# Altium PCB OpenCameraSlider_PCB.PcbDoc
Units mm, origin at the board's own origin, x right, y up, seen from the top; angles counter-clockwise.
Board outline 100 x 40 mm, 2 copper layers (Top Layer, Bottom Layer), stack 1.571 mm thick; 18 components, 27 nets, 111 pads, 11 vias.
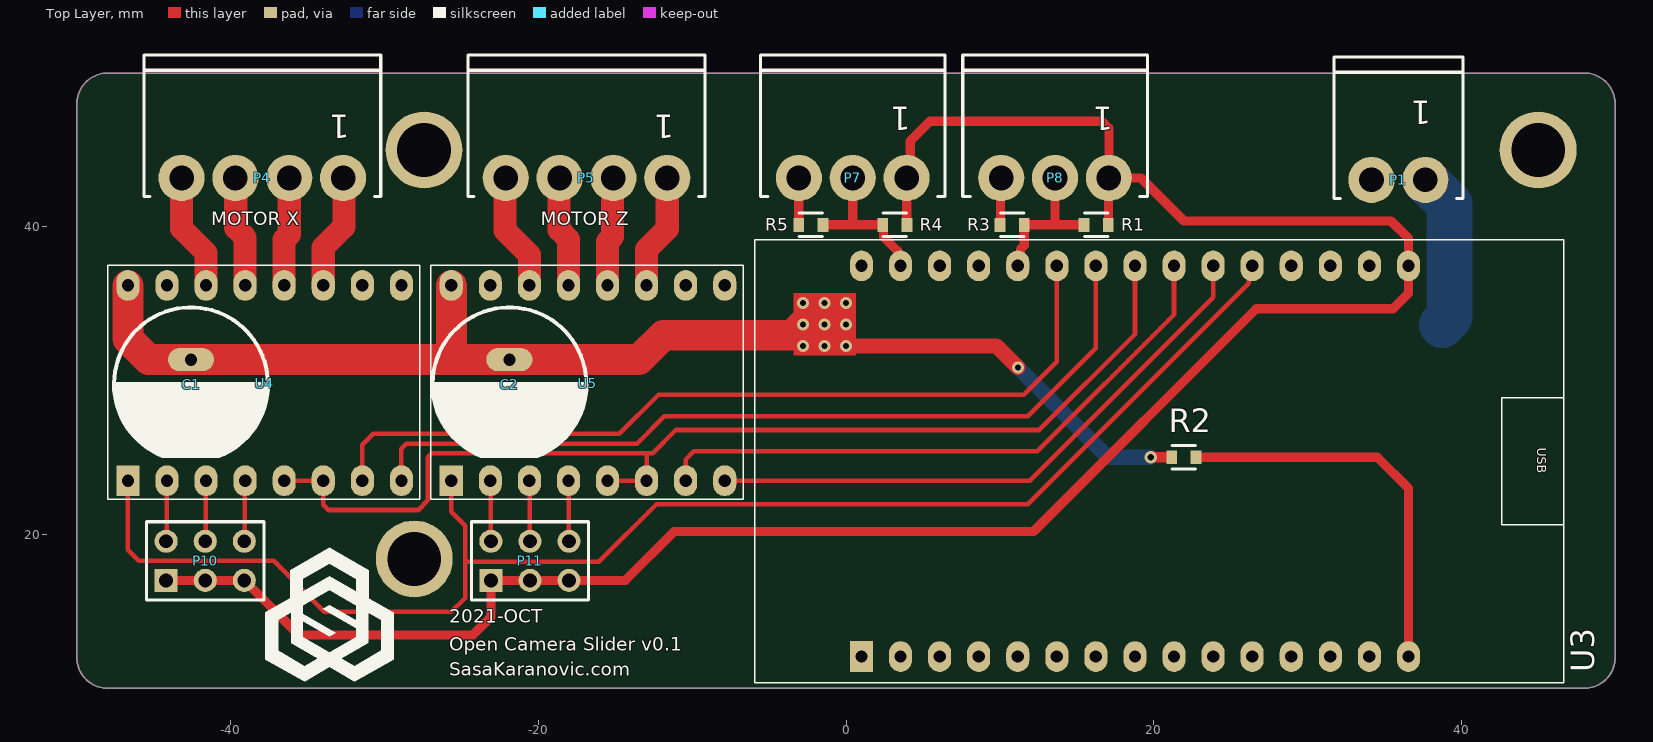
[diagram p0: Top Layer view]
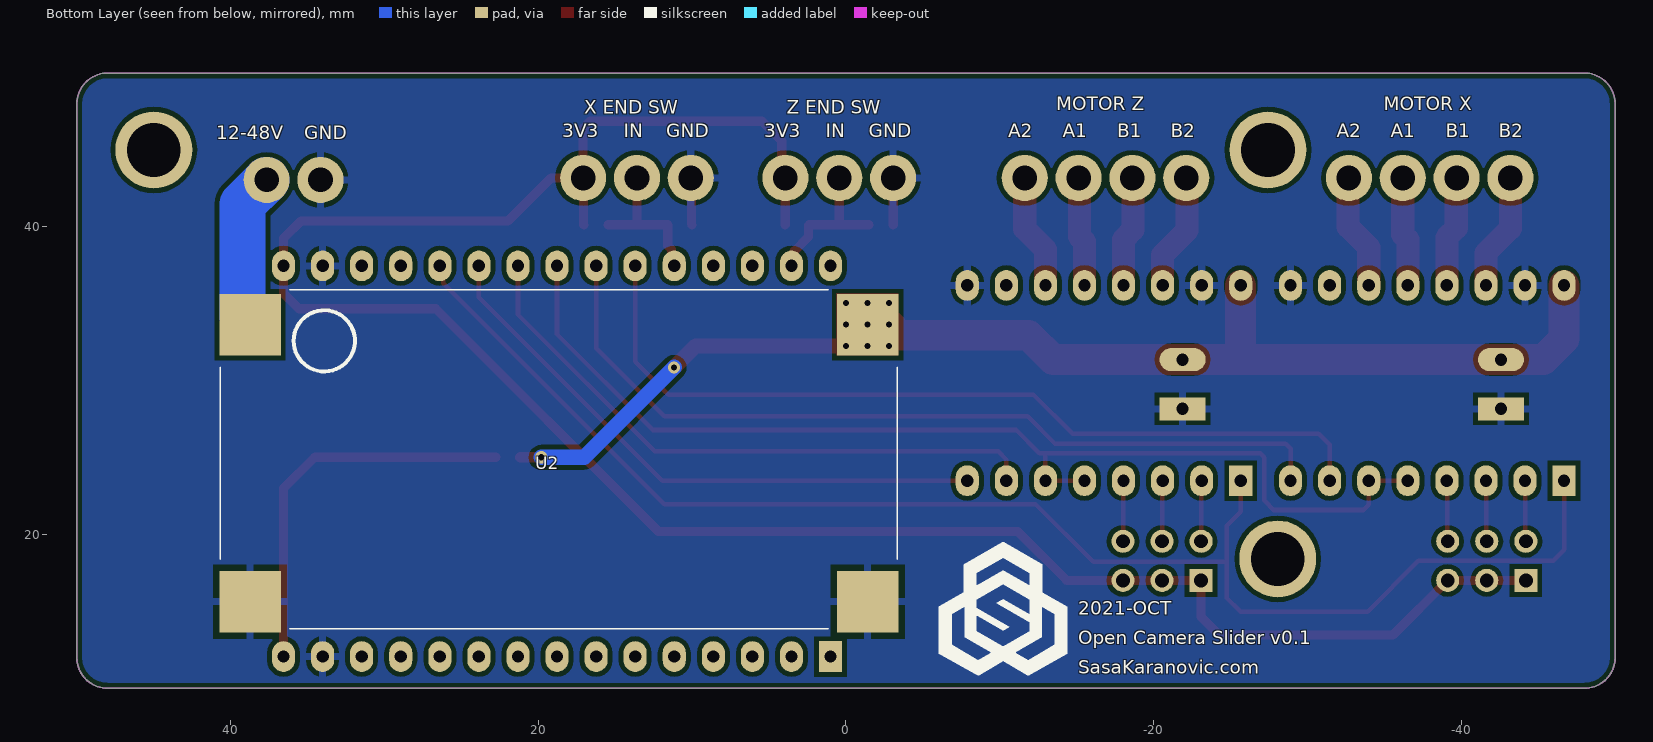
[diagram p1: Bottom Layer view, seen from below]
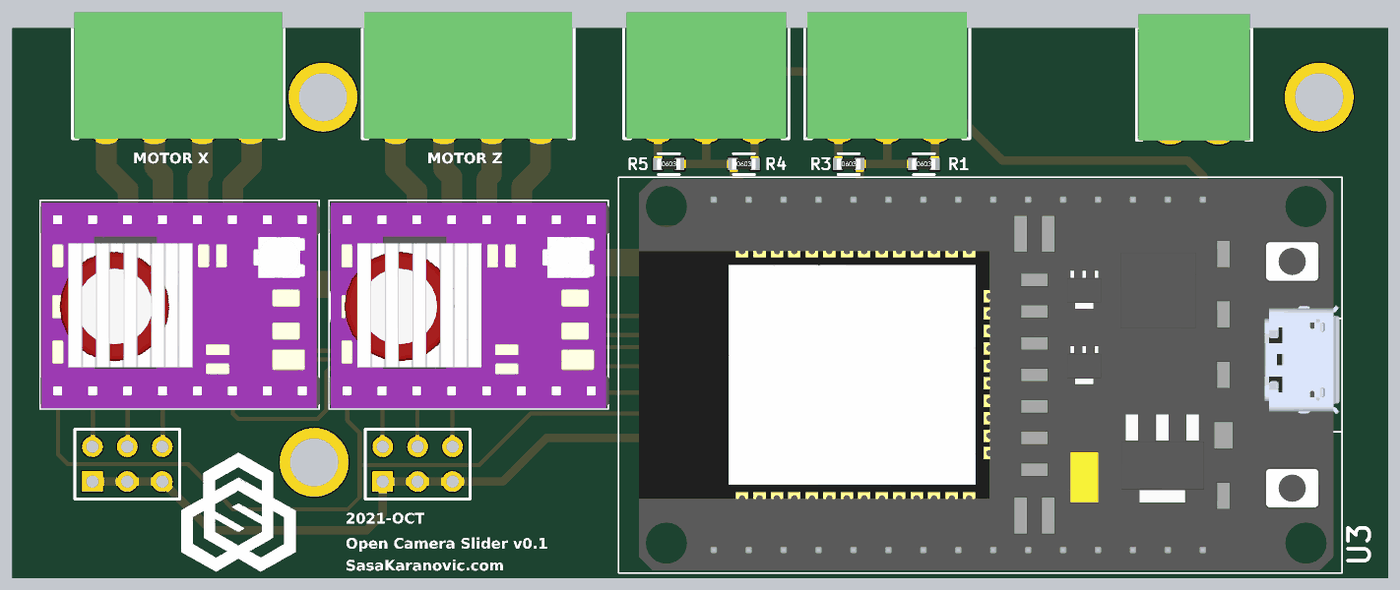
[diagram p2: 3D render of the assembled board from above, using the file's embedded part models]

## Layer stack, top to bottom
Top Solder: solder mask 0.0102, Solder Resist, Dk 3.5
Top Layer: signal copper 0.0356
Dielectric 1: dielectric 1.5, FR-4, Dk 4.8
Bottom Layer: signal copper 0.0356
Bottom Solder: solder mask 0.0102, Solder Resist, Dk 3.5

## Board outline
-48,10 cw(c-48,12) -50,12 -50,48 cw(c-48,48) -48,50 48,50 cw(c48,48) 50,48 50,12 cw(c48,12) 48,10

## Design rules (kind name [scope] priority, off if disabled: settings)
Clearance Clearance_1 [InNamedPolygon('GND_L02_P001')] p1: gap=0.3 ignorepadtopadclearanceinfootprint=FALSE
Clearance [All] p2: gap=0.254 ignorepadtopadclearanceinfootprint=FALSE
HoleSize [All] p1: absolutevalues=TRUE maxlimit=50 minlimit=0.4 maxpercent=80.000 minpercent=20.000
MinimumSolderMaskSliver [All] p1 off: minsoldermaskwidth=0.1
PlaneConnect [All] p1: pad.planeconnectstyle=Relief pad.reliefexpansion=0.508 pad.reliefentries=4 pad.reliefconductorwidth=0.254 pad.reliefairgap=0.254 via.planeconnectstyle=Direct via.reliefexpansion=0.508 via.reliefentries=4 via.reliefconductorwidth=0.254 via.reliefairgap=0.254
PolygonConnect [All] p1: thpad.connectstyle=Relief thpad.reliefconductorwidth=0.5 thpad.reliefentries=4 thpad.polygonreliefangle="90 Angle" thpad.airgapwidth=0.3 smdpad.connectstyle=Relief smdpad.reliefconductorwidth=0.5 smdpad.reliefentries=4 smdpad.polygonreliefangle="90 Angle" smdpad.airgapwidth=0.4 via.connectstyle=Direct via.reliefconductorwidth=0.254 via.reliefentries=4 via.polygonreliefangle="90 Angle" via.airgapwidth=0.254
RoutingVias [All] p1: holewidth=0.8 width=0.8 viastyle="Through Hole" minholewidth=0.3 minwidth=0.6 maxholewidth=0.4 maxwidth=50
SilkToSilkClearance [All] p1 off: silktosilkclearance=0.1
SilkToSolderMaskClearance [IsPad] p1 off: minsilkscreentomaskgap=0.1 clearancetoexposedcopper=TRUE
SolderMaskExpansion [All] p1: expansion=0.102 istentingtop=FALSE
Width [All] p1: maxlimit=50 minlimit=0.154 preferedwidth=0.2
25 further rules are at their usual default settings.

## Components (designator, comment, footprint, x,y, rotation, side; value= is the part's Value field where it differs from the comment)
C1 "16V" "Electrolytic Cap 3.2mm" -42.582,29.769 r270 top value=100uF
C2 "16V" "Electrolytic Cap 3.2mm" -21.881,29.769 r270 top value=100uF
P1 "Power In" TERMINAL_2POS_90DEG_2PART 35.913,51.053 r180 top
P4 "X-Axis Motor" TERMINAL_4POS_90DEG_2PART -37.945,51.18 r180 top locked
P5 "Z-Axis Motor" TERMINAL_4POS_90DEG_2PART -16.87,51.18 r180 top locked
P7 "Hall Sensor" TERMINAL_3POS_90DEG_2PART 0.437,51.18 r180 top locked
P8 "End Switch" TERMINAL_3POS_90DEG_2PART 13.589,51.18 r180 top locked
P10 "Header 3X2" HDR2X3 -44.196,17.018 r0 top
P11 "Header 3X2" HDR2X3 -23.087,17.018 r0 top
R1 "Res" 0603 16.256,40.132 r0 top value=10K
R2 "Res" 0603 21.971,25.019 r180 top value=0R
R3 "Res" 0603 10.795,40.132 r0 top value=DNP
R4 "Res" 0603 3.175,40.132 r0 top value=10K
R5 "Res" 0603 -2.286,40.132 r0 top value=DNP
U2 "LM2596-DC-DC Module" "LM2596-DC-DC Module" 18.669,24.638 r180 bottom
U3 "ESP32 Dev Kit" ESP32-DevModule 20.066,24.765 r90 top locked
U4 "DRV8825 Module" DRV8825_MODULE -37.883,29.845 r90 top locked
U5 "DRV8825 Module" DRV8825_MODULE -16.864,29.845 r90 top locked

## Footprints (in the part's own frame and the unit in brackets; to place one, negate y for a bottom-side part, rotate by r counter-clockwise, add the part's x,y. Pads: shape width x height; smd on the part's side, far side on the other; paste and mask are expansions set on the pad)
0603 [mm]
  rect 0.7x0.9 smd: 1(-0.79,0) 2(0.79,0)
  silkscreen extent -0.76,-0.76 0.76,0.76, body extent -0.85,-0.4 0.85,0.4, height 0.56
DRV8825_MODULE [mm]
  rect 2x1.5 hole 0.8 unplated: 1(-6.35,8.8)
  oval 2x1.5 hole 0.8 unplated: 2(-6.35,6.26) 3(-6.35,3.72) 4(-6.35,1.18) 5(-6.35,-1.36) 6(-6.35,-3.9) 7(-6.35,-6.44) 8(-6.35,-8.98) 9(6.35,-8.98) 10(6.35,-6.44) 11(6.35,-3.9) 12(6.35,-1.36) 13(6.35,1.18) 14(6.35,3.72) 15(6.35,6.26) 16(6.35,8.8)
  silkscreen extent -7.55,-10.18 7.65,10.12, body extent -7.5,-10.22 7.5,10.1, height 13.2
"Electrolytic Cap 3.2mm" [mm] "Elektrolitski kondenzator, razmak 3.2mm 470uF"
  oval 1.5x3 hole 0.8: 1(-1.6,0)
  rect 1.5x3 hole 0.8: 2(1.6,0)
  silkscreen extent -5,-5.13 4.79,5.13, body extent -4,-4 4,4, height 12.2
ESP32-DevModule [mm]
  rect 2x1.5 hole 0.8 unplated: 1(-12.7,19.06)
  oval 2x1.5 hole 0.8 unplated: 2(-12.7,16.52) 3(-12.7,13.98) 4(-12.7,11.44) 5(-12.7,8.9) 6(-12.7,6.36) 7(-12.7,3.82) 8(-12.7,1.28) 9(-12.7,-1.26) 10(-12.7,-3.8) 11(-12.7,-6.34) 12(-12.7,-8.88) 13(-12.7,-11.42) 14(-12.7,-13.96) 15(-12.7,-16.5) 16(12.7,-16.5) 17(12.7,-13.96) 18(12.7,-11.42) 19(12.7,-8.88) 20(12.7,-6.34) 21(12.7,-3.8) 22(12.7,-1.26) 23(12.7,1.28) 24(12.7,3.82) 25(12.7,6.36) 26(12.7,8.9) 27(12.7,11.44) 28(12.7,13.98) 29(12.7,16.52) 30(12.7,19.06)
  silkscreen extent -14.4,-26.6 14.4,26, body extent -14.22,-26.4 14.28,24.53, height 12.2
HDR2X3 [mm] "Connector; Header; 3x2 Position"
  rect 1.5x1.5 hole 0.9: 1(0,0)
  round 1.5 hole 0.9: 2(0,2.54) 3(2.54,0) 4(2.54,2.54) 5(5.08,0) 6(5.08,2.54)
  silkscreen extent -1.27,-1.27 6.35,3.81
"LM2596-DC-DC Module" [mm]
  rect 4x4 smd: 1(-20.075,9) 2(-20.075,-9) 3(20.075,-9) 4(20.075,9)
  silkscreen extent -22,-10.75 22,11.27, body extent -21.55,-10.33 21.65,10.92, height 13.55
TERMINAL_2POS_90DEG_2PART [mm] "TERM BLOCK HDR 4POS 90DEG 3.5MM"
  round 3 hole 1.6: 1(-1.75,8) 2(1.75,8)
  silkscreen extent -4.2,0 4.2,9.2, body extent -4.05,0 4.05,9.2, height 7.3
TERMINAL_3POS_90DEG_2PART [mm] "TERM BLOCK HDR 4POS 90DEG 3.5MM"
  round 3 hole 1.6: 1(-3.5,8) 2(0,8) 3(3.5,8)
  silkscreen extent -6,0 6,9.2, body extent -5.8,0 5.8,9.2, height 7.3
TERMINAL_4POS_90DEG_2PART [mm] "TERM BLOCK HDR 4POS 90DEG 3.5MM"
  round 3 hole 1.6: 1(-5.25,8) 2(-1.75,8) 3(1.75,8) 4(5.25,8)
  silkscreen extent -7.7,0 7.7,9.2, body extent -7.55,0 7.55,9.2, height 7.3

## Part data
C1 C2: library part "Cap Electrolytic", "Polarized Capacitor (Axial)", Distributor Part Number=732-11917-1-ND, Manufacturer="Würth Elektronik", Manufacturer Part Number=870135675003, Distributor=DigiKey
P1: library part "Terminal 2_691322110002", "2 Position Terminal Block Header, Male Pins, Shrouded (4 Side) 0.138\" (3.50mm) 90°, Right Angle - Through Hole", Distributor Part Number=732-2769-ND, Manufacturer="Würth Elektronik", Manufacturer Part Number=691322110002, Distributor=DigiKey
P4 P5: library part "Terminal 4_691322110004", "TERM BLOCK HDR 4POS 90DEG 3.5MM", Distributor Part Number=732-2771-ND, Manufacturer="Würth Elektronik", Manufacturer Part Number=691322110004, Distributor=DigiKey
P7 P8: library part "Terminal 3_691322110003_1", "TERM BLOCK HDR 3POS 90DEG 3.5MM", Distributor Part Number=732-2770-ND, Manufacturer="Würth Elektronik", Manufacturer Part Number=691322110003, Distributor=DigiKey
P10 P11: "Header, 3-Pin, Dual row", Distributor Part Number=WM13106-ND, Manufacturer=Molex, Manufacturer Part Number=0010897080, Distributor=DigiKey
R1 R3 R4 R5: "Resistor", Distributor Part Number=13-AA0603FR-0710KLCT-ND, Manufacturer=YAGEO, Manufacturer Part Number=AA0603FR-0710KL, Distributor=DigiKey
R2: "Resistor", Distributor Part Number=13-RC0603FR-130RLCT-ND, Manufacturer=YAGEO, Manufacturer Part Number=RC0603FR-130RL, Distributor=DigiKey
U2: "LM2596-DC-DC Module HW-411", Manufacturer Part Number=LM2596-DC-DC, Distributor=AliExpress, Distributor Part Number=https://www.aliexpress.com/item/33004374185.html, URL=https://www.aliexpress.com/item/33004374185.html
U3: library part ESP32_DEV, Manufacturer=Espressif, Distributor=AliExpress, Distributor Part Number=https://www.aliexpress.com/item/1005001757645011.html, URL=https://www.aliexpress.com/item/1005001757645011.html
U4 U5: Distributor=AliExpress, Distributor Part Number=https://www.aliexpress.com/item/32597532420.html, URL=https://www.aliexpress.com/item/32597532420.html

## Free pads (board coordinates)
  round 5 hole 3.5 unplated: ""(-28.067,18.415) ""(-27.432,45) ""(45,45)

## Via types
v1: diameter 0.8, hole 0.4, Top Layer to Bottom Layer, tented both sides, 11 vias

## Nets (pads, with @x,y where several pads share a name; then routed paths per layer and width w, separated by ;. In a path a pad name is that pad's centre, name@x,y a point inside that pad or via, vN(x,y) a via of type N, cw(c..) or ccw(c..) an arc to the next point about the centre after c; other vN are vias at no path point)
3V3: P7.1 P8.1 P10.1 P10.3 P10.5 P11.1 P11.3 P11.5 R1.2 R4.2 U3.16 | length 143
  Top Layer w0.6: P10.1 P10.3 P10.5 -35.56,13.462 -24.257,13.462 -23.087,14.632 P11.1 P11.3 P11.5 -14.351,17.018 -11.176,20.193 12.192,20.193 26.67,34.671 35.56,34.671 36.566,35.677 U3.16 36.566,39.253 35.433,40.386 21.971,40.386 19.177,43.18 P8.1 ; R4.2 3.951,40.146 3.951,43.166 P7.1 4.178,43.421 4.178,45.58 5.461,46.863 16.637,46.863 17.089,46.411 P8.1 ; R1.2 17.067,40.153 17.067,43.158 P8.1
12V: C1.1 C2.1 R2.2 U2.4 U4.16 U5.16 | length 81.6
  Top Layer w0.7: v1(19.812,25.019) R2.2
  Top Layer w1: U4.16 U4.16@-46.683,36.322 ; U5.16 U5.16@-25.654,36.185 ; v1(-1.397,33.655) v1(0,32.258) 9.779,32.258 v1(11.176,30.861)
  Top Layer w2: U4.16 -46.683,32.713 -45.339,31.369 C1.1 -25.654,31.369 ; U5.16@-25.654,36.185 -25.654,31.369 ; v1(-1.397,33.655) -1.7,33.352 -2.429,33.352 -2.732,33.655 v1(-2.794,33.655) -3.492,32.956 -11.874,32.956 -13.462,31.369 C2.1 -25.654,31.369
  Bottom Layer w1: v1(11.176,30.861) 17.018,25.019 v1(19.812,25.019)
  other v1: -2.794,32.258 -1.397,32.258 0,33.655 -2.794,35.052 -1.397,35.052 0,35.052
END_SWITCH_X: P8.2 R1.1 R3.2 U3.26 | length 9.8
  Top Layer w0.6: U3.26 11.338,37.637 11.338,38.535 11.585,38.782 R3.2 13.589,40.132 ; P8.2 13.589,40.132 ; R1.1 13.589,40.132
END_SWITCH_Z: P7.2 R4.1 R5.2 U3.29 | length 9.1
  Top Layer w0.6: R5.2 0.437,40.132 ; P7.2 0.437,40.132 ; U3.29@3.374,38.409 2.435,39.348 2.435,40.082 R4.1 0.437,40.132
GND: C1.2 C2.2 P1.2 P7.3 P8.3 R3.1 R5.1 U2.2 U2.3 U3.14 U3.17 U4.9 U4.15 U5.9 U5.15 | length 6.1
  Top Layer w0.6: R5.1 -3.069,40.138 -3.069,43.174 P7.3 ; R3.1 10.047,40.174 10.047,43.138 P8.3
MTR_EN: U3.20 U4.1 U5.1 | length 96.1
  Top Layer w0.3: U4.1 -46.683,18.997 -45.974,18.288 -37.211,18.288 -33.909,14.986 -25.654,14.986 -24.765,15.875 -24.765,18.224 ; U5.1 -25.664,21.473 -24.765,20.574 -24.765,18.224 ; U3.20 26.182,37.241 26.182,36.342 11.811,21.971 -12.319,21.971 -16.066,18.224 -24.765,18.224
MTR_RST: U3.23 U4.5 U4.6 U5.5 U5.6 | length 72.2
  Top Layer w0.3: U4.5 U4.6 -33.983,21.941 -33.631,21.59 -27.813,21.59 -27.178,22.225 -27.178,25.019 -26.924,25.273 -12.954,25.273 ; U5.5 U5.6 -12.964,25.263 -12.954,25.273 ; U3.23 18.786,33.01 12.573,26.797 -11.049,26.797 -12.573,25.273 -12.954,25.273
MTR_X_DIR: U3.24 U4.8 | length 55.3
  Top Layer w0.3: U4.8 -28.903,25.58 -28.575,25.908 -13.589,25.908 -11.811,27.686 11.811,27.686 16.246,32.121 U3.24
MTR_X_STEP: U3.25 U4.7 | length 56
  Top Layer w0.3: U4.7 -31.443,25.834 -30.734,26.543 -14.732,26.543 -12.192,29.083 11.557,29.083 13.706,31.232 U3.25
MTR_Z_DIR: U3.21 U5.8 | length 38.7
  Top Layer w0.3: U5.8 -2.794,23.495 11.938,23.495 23.866,35.423 U3.21
MTR_Z_STEP: U3.22 U5.7 | length 40.2
  Top Layer w0.3: U5.7 -10.424,24.876 -9.9,25.4 12.446,25.4 21.326,34.28 U3.22
NetP4_1: P4.1 U4.11 | length 7.6
  Top Layer w1.5: U4.11 -33.983,38.661 -32.639,40.005 -32.639,43.124 P4.1
NetP4_2: P4.2 U4.12 | length 7.1
  Top Layer w1.5: U4.12 -36.523,39.169 -36.195,39.497 P4.2
NetP4_3: P4.3 U4.13 | length 7.2
  Top Layer w1.5: P4.3 -39.672,43.157 -39.672,39.926 -39.063,39.317 U4.13
NetP4_4: P4.4 U4.14 | length 7.6
  Top Layer w1.5: P4.4 -43.195,39.893 -41.603,38.301 U4.14
NetP5_1: P5.1 U5.11 | length 7.5
  Top Layer w1.5: U5.11 -12.964,38.534 -11.62,39.878 P5.1
NetP5_2: P5.2 U5.12 | length 7.1
  Top Layer w1.5: U5.12 -15.504,39.042 -15.176,39.37 -15.176,43.124 P5.2
NetP5_3: P5.3 U5.13 | length 7.3
  Top Layer w1.5: P5.3 -18.654,43.147 -18.654,39.799 -18.044,39.19 U5.13
NetP5_4: P5.4 U5.14 | length 7.7
  Top Layer w1.5: P5.4 -22.176,43.124 -22.176,39.766 -20.584,38.174 U5.14
NetP10_2: P10.2 U4.2 | length 4
  Top Layer w0.3: P10.2 -44.169,19.585 -44.169,23.468 U4.2
NetP10_4: P10.4 U4.3 | length 4
  Top Layer w0.3: P10.4 -41.629,19.585 -41.629,23.468 U4.3
NetP10_6: P10.6 U4.4 | length 4
  Top Layer w0.3: P10.6 -39.089,19.585 -39.089,23.468 U4.4
NetP11_2: P11.2 U5.2 | length 4
  Top Layer w0.3: U5.2 -23.106,23.476 -23.106,19.576 P11.2
NetP11_4: P11.4 U5.3 | length 4
  Top Layer w0.3: U5.3 -20.566,23.476 -20.566,19.576 P11.4
NetP11_6: P11.6 U5.4 | length 4
  Top Layer w0.3: U5.4 -18.026,23.476 -18.026,19.576 P11.6
VIN: R2.1 U3.15 | length 25.6
  Top Layer w0.6: R2.1 34.544,25.019 36.566,22.997 U3.15
VIN_EXT: P1.1 U2.1 | length 10.3
  Bottom Layer w3: P1.1 39.243,41.473 39.243,34.137 U2.1
pads on no net: U3.1 U3.2 U3.3 U3.4 U3.5 U3.6 U3.7 U3.8 U3.9 U3.10 U3.11 U3.12 U3.13 U3.18 U3.19 U3.27 U3.28 U3.30 U4.10 U5.10

## Polygon pours and split planes (outlines as drawn)
GND on Bottom Layer "GND_L02_P001" (solid, remove dead copper, pour order 1): -48,10 cw(c-48,12) -50,12 -50,48 cw(c-48,48) -48,50 48,50 cw(c48,48) 50,48 50,12 cw(c48,12) 48,10

## Keep-outs
Keep-Out Layer:
  the board outline again, w0.1

## Other copper
Top Layer:
  rectangle net 12V: -3.429,31.623 0.635,35.687

## Silkscreen, mask and mechanical layers (free items; w line width, h text height)
Top Overlay:
  region: 5307 vertices and 4 holes, not listed, extent -37.759,10.453 -29.413,19.132
  text "MOTOR X" at -41.254,39.81 h1.5
  text "MOTOR Z" at -19.859,39.81 h1.5
  text "2021-OCT" at -25.781,13.97 h1.5
  text "Open Camera Slider v0.1" at -25.781,12.142 h1.5
  text "SasaKaranovic.com" at -25.781,10.541 h1.5
Bottom Overlay:
  region: 5307 vertices and 4 holes, not listed, extent -14.38,10.834 -6.034,19.513
  text "MOTOR X" at -34.946,47.303 h1.5
  text "MOTOR Z" at -13.669,47.303 h1.5
  text "Z END SW" at 3.866,47.047 h1.5
  text "X END SW" at 17.018,47.047 h1.5
  text "GND" at -1.482,45.536 h1.5
  text "3V3" at 5.308,45.536 h1.5
  text "GND" at 11.67,45.536 h1.5
  text "3V3" at 18.46,45.536 h1.5
  text "B2" at -42.449,45.517 h1.5
  text "B1" at -38.977,45.524 h1.5
  text "A1" at -35.418,45.524 h1.5
  text "A2" at -31.89,45.517 h1.5
  text "B2" at -21.113,45.517 h1.5
  text "B1" at -17.641,45.517 h1.5
  text "A1" at -14.082,45.517 h1.5
  text "A2" at -10.554,45.517 h1.5
  text "IN" at 1.31,45.517 h1.5
  text "IN" at 14.462,45.517 h1.5
  text "GND" at 35.203,45.397 h1.5
  text "12-48V" at 40.936,45.399 h1.5
  text "2021-OCT" at -15.113,14.478 h1.5
  text "Open Camera Slider v0.1" at -15.113,12.573 h1.5
  text "SasaKaranovic.com" at -15.113,10.668 h1.5
Drill Drawing:
  drawing of 245 lines, arcs and shapes, not listed
  text "Layer" at 110.245,17.272 h1.52
  text "Name" at 120.656,17.272 h1.52
  text "Material" at 144.272,17.272 h1.52
  text "Thickness" at 166.11,17.272 h1.52
  text "Constant" at 182.616,17.272 h1.52
  text "Board Layer Stack" at 197.09,17.272 h1.52
  text "Top Overlay" at 120.656,14.224 h1.52
  text "Top Solder" at 120.656,11.176 h1.52
  text "Solder Resist" at 144.272,11.176 h1.52
  text "0.010mm" at 166.11,11.176 h1.52
  text "3.5" at 182.616,11.176 h1.52
  text "1" at 110.245,8.128 h1.52
  text "Top Layer" at 120.656,8.128 h1.52
  text "0.036mm" at 166.11,8.128 h1.52
  text "Dielectric 1" at 120.656,5.08 h1.52
  text "FR-4" at 144.272,5.08 h1.52
  text "1.500mm" at 166.11,5.08 h1.52
  text "4.8" at 182.616,5.08 h1.52
  text "2" at 110.245,2.032 h1.52
  text "Bottom Layer" at 120.656,2.032 h1.52
  text "0.036mm" at 166.11,2.032 h1.52
  text "Bottom Solder" at 120.656,-1.016 h1.52
  text "Solder Resist" at 144.272,-1.016 h1.52
  text "0.010mm" at 166.11,-1.016 h1.52
  text "3.5" at 182.616,-1.016 h1.52
  text "Bottom Overlay" at 120.656,-4.064 h1.52
  text "Symbol" at 110.68,-13.399 h1.83
  text "Count" at 123.53,-13.399 h1.83
  text "Hole Size" at 138.512,-13.399 h1.83
  text "Plated" at 167.713,-13.399 h1.83
  text "Hole Type" at 180.562,-13.399 h1.83
  text "Via/Pad" at 199.201,-13.399 h1.83
  text "3" at 123.53,-17.209 h1.52
  text "3.500mm (137.79mil)" at 138.512,-17.209 h1.52
  text "NPTH" at 167.713,-17.209 h1.52
  text "Round" at 180.562,-17.209 h1.52
  text "Pad" at 199.201,-17.209 h1.52
  text "4" at 123.53,-21.018 h1.52
  text "0.800mm (31.50mil)" at 138.512,-21.018 h1.52
  text "PTH" at 167.713,-21.018 h1.52
  text "Round" at 180.562,-21.018 h1.52
  text "Pad" at 199.201,-21.018 h1.52
  text "11" at 123.53,-24.828 h1.52
  text "0.400mm (15.75mil)" at 138.512,-24.828 h1.52
  text "PTH" at 167.713,-24.828 h1.52
  text "Round" at 180.562,-24.828 h1.52
  text "Via" at 199.201,-24.828 h1.52
  text "12" at 123.53,-28.639 h1.52
  text "0.900mm (35.43mil)" at 138.512,-28.639 h1.52
  text "PTH" at 167.713,-28.639 h1.52
  text "Round" at 180.562,-28.639 h1.52
  text "Pad" at 199.201,-28.639 h1.52
  text "16" at 123.53,-32.448 h1.52
  text "1.600mm (62.99mil)" at 138.512,-32.448 h1.52
  text "PTH" at 167.713,-32.448 h1.52
  text "Round" at 180.562,-32.448 h1.52
  text "Pad" at 199.201,-32.448 h1.52
  text "62" at 123.53,-36.258 h1.52
  text "0.800mm (31.50mil)" at 138.512,-36.258 h1.52
  text "NPTH" at 167.713,-36.258 h1.52
  text "Round" at 180.562,-36.258 h1.52
  text "Pad" at 199.201,-36.258 h1.52
  text "108 Total" at 123.53,-40.069 h1.52

## Text inside footprints (layer, text, board x,y; h text height)
P1: Top Overlay "1" at 38.063,48.203 h1.52 r180
P4: Top Overlay "1" at -32.245,47.28 h1.52 r180
P5: Top Overlay "1" at -11.171,47.28 h1.52 r180
P7: Top Overlay "1" at 4.212,47.805 h1.52 r180
P8: Top Overlay "1" at 17.364,47.805 h1.52 r180
U3: Top Overlay "USB" at 44.728,25.65 h1 r270